# EAGLE board OpenTherm_Board_77X (EAGLE 9.6.2)
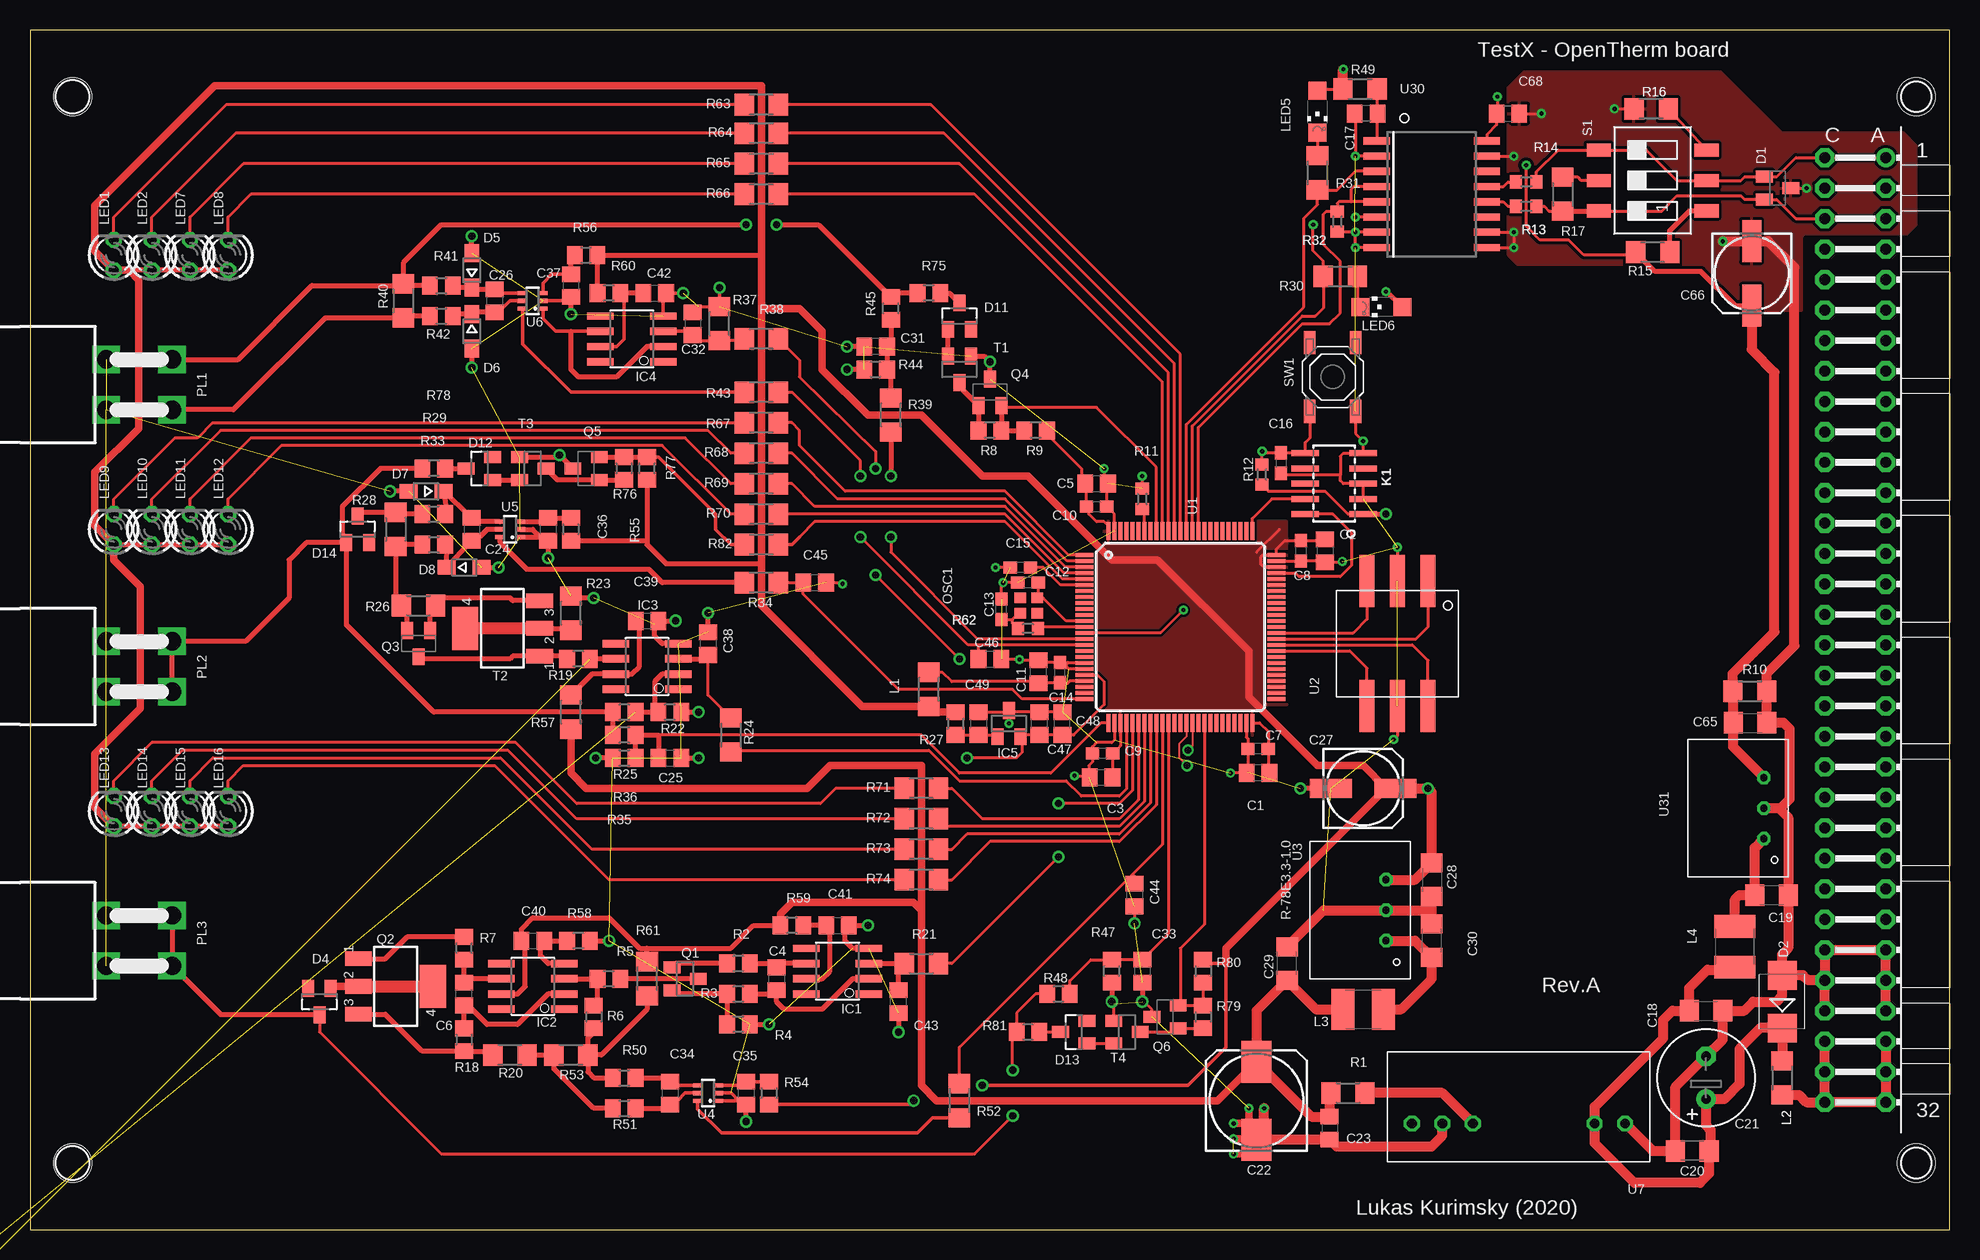
[diagram p0: board, top side]
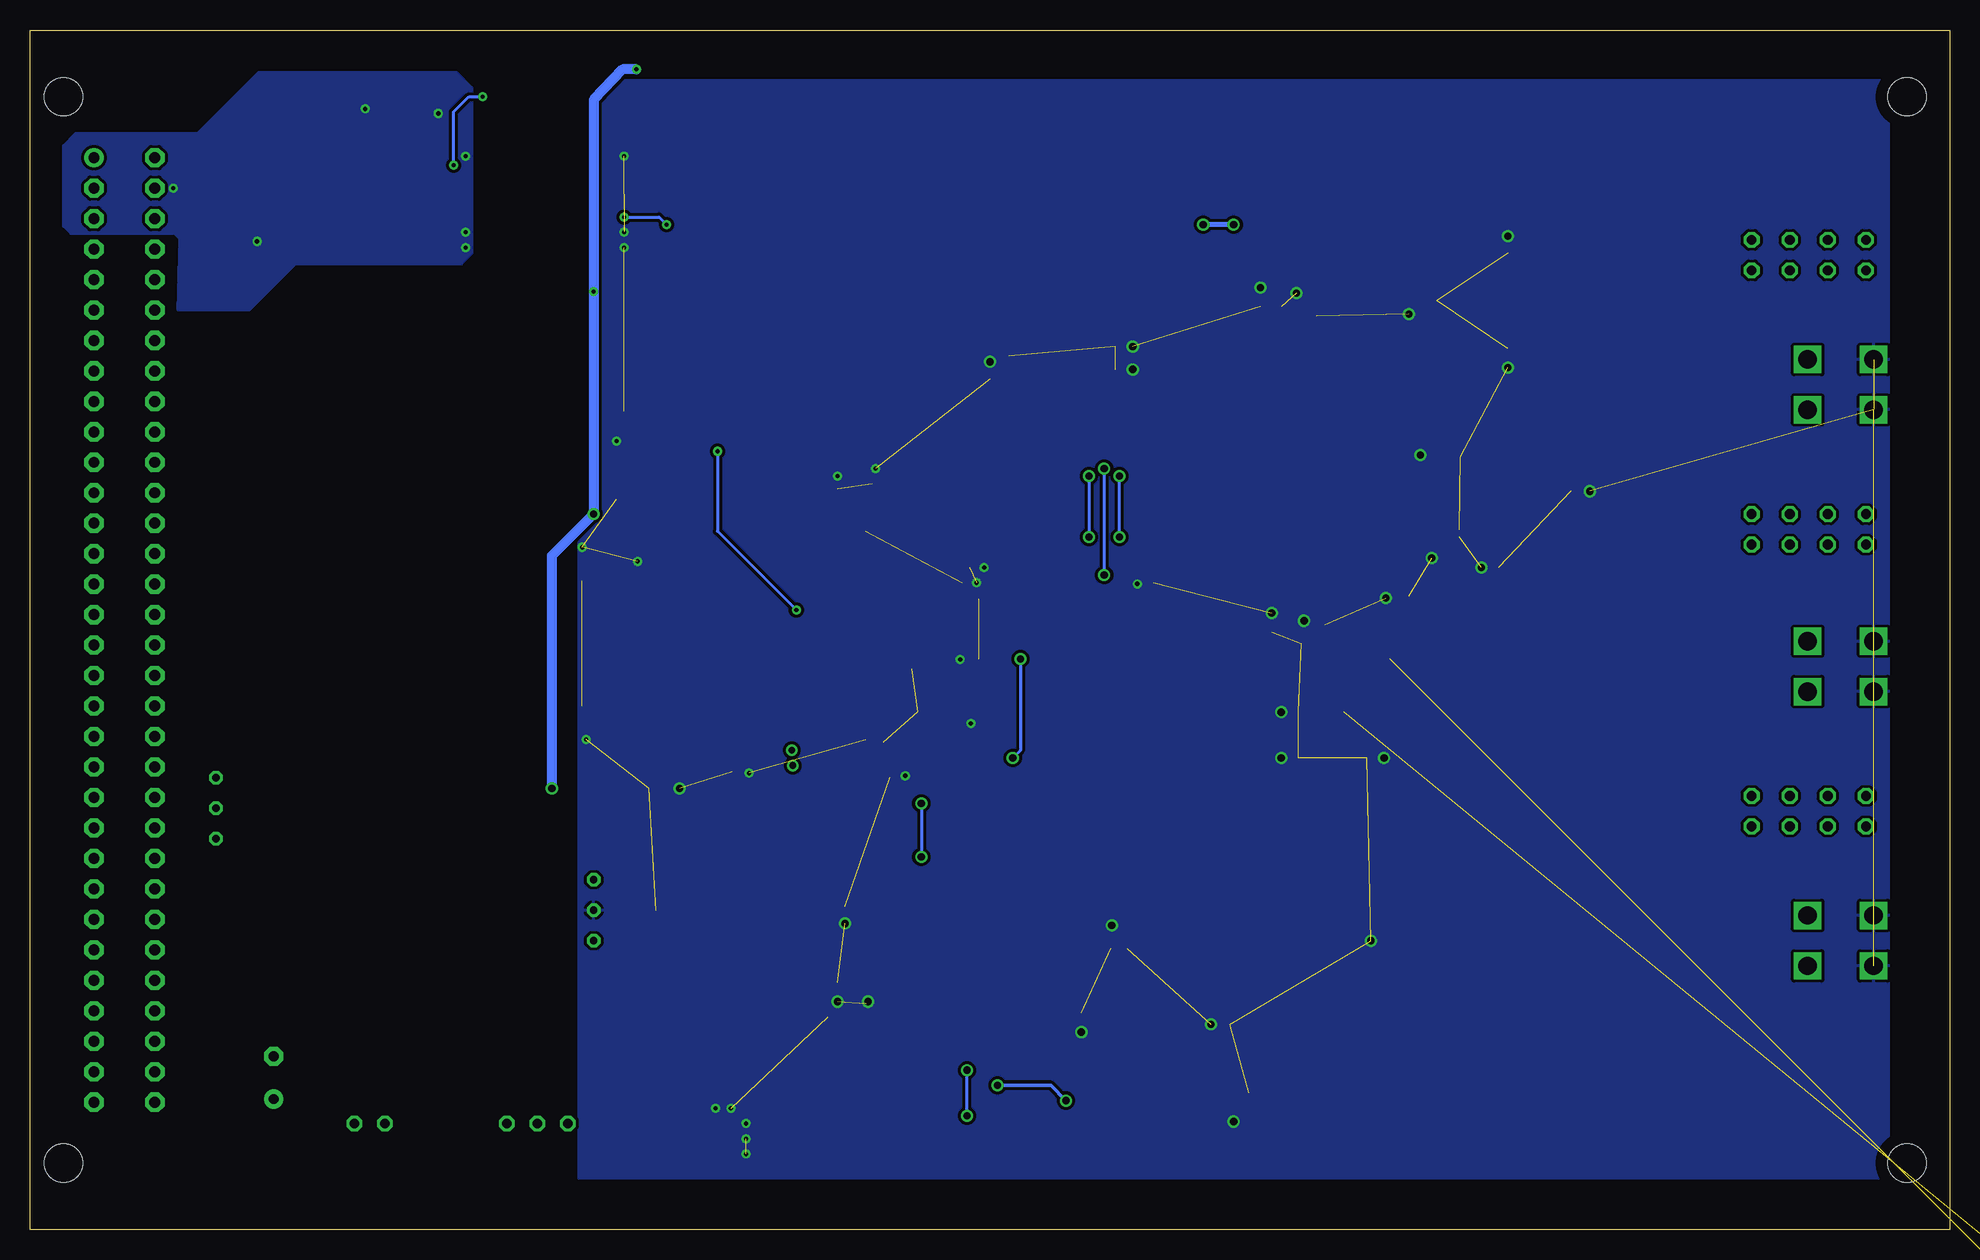
[diagram p1: board, bottom side, seen from below]

Size 160.02 x 100.03 mm. Coordinates in mm from the lower left corner, seen from the top.
Copper layers (1*16): Top 0.035mm / dielectric 1.5mm / Bottom 0.035mm
Design rules "default": minimum track width 6mil, minimum drill 0.35mm, track to track 6mil, track to pad 6mil, pad to pad 6mil, via to via 6mil, smd to smd 6mil, copper to edge 40mil, drill to drill 6mil, minimum pad ring 10mil, minimum via ring 8mil, stop-mask expansion 4mil, vias tented up to drill 0mil, thermal gap 10mil
Holes 3.17 mm at 3.56,5.56 3.56,94.46 157.23,94.46 157.23,5.56

## Footprints (pad centres in the part's own frame; a part is rotated, then mirrored left to right if it is on the bottom)
C0805 = smd 1.3 x 1.5: 1 -0.95,0; 2 0.95,0
C0603 = smd 1.1 x 1: 1 -0.85,0; 2 0.85,0
C0603:1 = smd 1.1 x 1: 1 -0.85,0; 2 0.85,0
C1206 = smd 1.6 x 1.8: 1 -1.4,0; 2 1.4,0
E3,5-8 = drill 0.813 pad 1.6: + -1.778,0 | drill 0.813 pad 1.6 octagon: - 1.778,0
153CLV-0810 = smd 3.5 x 2.5: + 3.25,0; - -3.25,0
153CLV-0605 = smd 3.5 x 1.6: + 2.7,0; - -2.7,0
SOT23-BEC = smd 1 x 1.4: B -0.95,-1.1; C 0,1.1; E 0.95,-1.1
SMB = smd 2.4 x 2.4: A 2.2,0; C -2.2,0
SOT23 = smd 1 x 1.4: 1 -0.95,-1.1; 2 0.95,-1.1; 3 0,1.1
SOD323-W = smd 1.5 x 1.2: A 1.45,0; C -1.45,0
SO08 = smd 0.61 x 2.21: 1 -1.905,-2.616; 2 -0.635,-2.616; 3 0.635,-2.616; 4 1.905,-2.616; 5 1.905,2.616; 6 0.635,2.616; 7 -0.635,2.616; 8 -1.905,2.616
SAMTECH_FTSH-105-01 = smd 0.508 x 2.286: 1 -2.54,-2.413; 2 -2.54,2.413; 3 -1.27,-2.413; 4 -1.27,2.413; 5 0,-2.413; 6 0,2.413; 7 1.27,-2.413; 8 1.27,2.413; 9 2.54,-2.413; 10 2.54,2.413
VG64P = drill 0.914 pad 1.6: A1 154.94,39.37 | drill 0.914 pad 1.6 octagon: A2 154.94,36.83; A3 154.94,34.29; A4 154.94,31.75; A5 154.94,29.21; A6 154.94,26.67; A7 154.94,24.13; A8 154.94,21.59; A9 154.94,19.05; A10 154.94,16.51; A11 154.94,13.97; A12 154.94,11.43; A13 154.94,8.89; A14 154.94,6.35; A15 154.94,3.81; A16 154.94,1.27; A17 154.94,-1.27; A18 154.94,-3.81; A19 154.94,-6.35; A20 154.94,-8.89; A21 154.94,-11.43; A22 154.94,-13.97; A23 154.94,-16.51; A24 154.94,-19.05; A25 154.94,-21.59; A26 154.94,-24.13; A27 154.94,-26.67; A28 154.94,-29.21; A29 154.94,-31.75; A30 154.94,-34.29; A31 154.94,-36.83; A32 154.94,-39.37; C1 149.86,39.37; C2 149.86,36.83; C3 149.86,34.29; C4 149.86,31.75; C5 149.86,29.21; C6 149.86,26.67; C7 149.86,24.13; C8 149.86,21.59; C9 149.86,19.05; C10 149.86,16.51; C11 149.86,13.97; C12 149.86,11.43; C13 149.86,8.89; C14 149.86,6.35; C15 149.86,3.81; C16 149.86,1.27; C17 149.86,-1.27; C18 149.86,-3.81; C19 149.86,-6.35; C20 149.86,-8.89; C21 149.86,-11.43; C22 149.86,-13.97; C23 149.86,-16.51; C24 149.86,-19.05; C25 149.86,-21.59; C26 149.86,-24.13; C27 149.86,-26.67; C28 149.86,-29.21; C29 149.86,-31.75; C30 149.86,-34.29; C31 149.86,-36.83; C32 149.86,-39.37
R1206 = smd 1.6 x 1.803: 1 -1.422,0; 2 1.422,0
L1812 = smd 1.9 x 3.4: 1 -1.696,0; 2 1.696,0
LED3MM = drill 0.813 octagon: A -1.27,0; K 1.27,0
CHIPLED_1206 = smd 1.5 x 1.5: A 0,-1.75; C 0,1.75
OSCILATOR = smd 0.965 x 0.864: 1 -0.762,-0.635; 2 0.635,-0.635; 3 0.635,0.635; 4 -0.762,0.635
5569-4 = drill 1.524 square: 1 2.1,0; 2 -2.1,0; 3 2.1,5.5; 4 -2.1,5.5
SOT223 = smd 1.219 x 2.235: 1 -2.311,-3.099; 2 0,-3.099; 3 2.311,-3.099 | smd 3.6 x 2.2: 4 0,3.099
R0805 = smd 1.3 x 1.5: 1 -0.95,0; 2 0.95,0
R0603 = smd 1 x 1.1: 1 -0.85,0; 2 0.85,0
SMS-003 = smd 1.092 x 2.007: 1 -2.54,-4.496; 2 0,-4.496; 3 2.54,-4.496; 4 2.54,4.496; 5 0,4.496; 6 -2.54,4.496
TACTB-64K-F = smd 1.93 x 0.965: 1 -2.857,1.905; 2 2.857,1.905; 3 -2.857,-1.905; 4 2.857,-1.905
TQFP100 = smd 1.5 x 0.35: 1 -8,6; 2 -8,5.5; 3 -8,5; 4 -8,4.5; 5 -8,4; 6 -8,3.5; 7 -8,3; 8 -8,2.5; 9 -8,2; 10 -8,1.5; 11 -8,1; 12 -8,0.5; 13 -8,0; 14 -8,-0.5; 15 -8,-1; 16 -8,-1.5; 17 -8,-2; 18 -8,-2.5; 19 -8,-3; 20 -8,-3.5; 21 -8,-4; 22 -8,-4.5; 23 -8,-5; 24 -8,-5.5; 25 -8,-6; 51 8,-6; 52 8,-5.5; 53 8,-5; 54 8,-4.5; 55 8,-4; 56 8,-3.5; 57 8,-3; 58 8,-2.5; 59 8,-2; 60 8,-1.5; 61 8,-1; 62 8,-0.5; 63 8,0; 64 8,0.5; 65 8,1; 66 8,1.5; 67 8,2; 68 8,2.5; 69 8,3; 70 8,3.5; 71 8,4; 72 8,4.5; 73 8,5; 74 8,5.5; 75 8,6 | smd 0.35 x 1.5: 26 -6,-8; 27 -5.5,-8; 28 -5,-8; 29 -4.5,-8; 30 -4,-8; 31 -3.5,-8; 32 -3,-8; 33 -2.5,-8; 34 -2,-8; 35 -1.5,-8; 36 -1,-8; 37 -0.5,-8; 38 0,-8; 39 0.5,-8; 40 1,-8; 41 1.5,-8; 42 2,-8; 43 2.5,-8; 44 3,-8; 45 3.5,-8; 46 4,-8; 47 4.5,-8; 48 5,-8; 49 5.5,-8; 50 6,-8; 76 6,8; 77 5.5,8; 78 5,8; 79 4.5,8; 80 4,8; 81 3.5,8; 82 3,8; 83 2.5,8; 84 2,8; 85 1.5,8; 86 1,8; 87 0.5,8; 88 0,8; 89 -0.5,8; 90 -1,8; 91 -1.5,8; 92 -2,8; 93 -2.5,8; 94 -3,8; 95 -3.5,8; 96 -4,8; 97 -4.5,8; 98 -5,8; 99 -5.5,8; 100 -6,8
HEX_DEC = smd 1.219 x 4.318: 1 2.54,5.842; 2 -2.54,-4.572; 4 -2.54,5.842; 8 2.54,-4.572; C1 0,5.842; C2 0,-4.572
R-78E-0.5 = drill 0.6 octagon: 1 -2.54,0; 2 0,0; 3 2.54,0
SC70-6L = smd 0.35 x 0.8: 1 -0.65,-0.85; 2 0,-0.85; 3 0.65,-0.85; 4 0.65,0.85; 5 0,0.85; 6 -0.65,0.85
IU2405SA = drill 0.8 octagon: NC 10.541,0; VIN+ -4.699,0; VIN- -7.239,0; VOUT+ 5.461,0; VOUT- 8.001,0
SO-16DW = smd 0.6 x 2.2: 1 -4.445,-4.6; 2 -3.175,-4.6; 3 -1.905,-4.6; 4 -0.635,-4.6; 5 0.635,-4.6; 6 1.905,-4.6; 7 3.175,-4.6; 8 4.445,-4.6; 9 4.445,4.6; 10 3.175,4.6; 11 1.905,4.6; 12 0.635,4.6; 13 -0.635,4.6; 14 -1.905,4.6; 15 -3.175,4.6; 16 -4.445,4.6

## Placement (x,y rotation side)
C1  1u  [C0805]  102.36,38.07 180 top
C2  1u  [C0805]  107.95,56.62 270 top
C3  1u  [C0805]  89.28,37.69 180 top
C4  100p  [C0805]  62.23,20.93 270 top
C5  1u  [C0805]  88.9,62.2 0 top
C6  100p  [C0805]  36.2,19.66 90 top
C7  100n  [C0603]  102.36,40.11 180 top
C8  100n  [C0603]  105.92,56.62 270 top
C9  100n  [C0603]  89.41,39.73 180 top
C10  100n  [C0603]  88.9,60.3 0 top
C11  1u  [C0805]  84.07,46.52 90 top
C12  10p  [C0603]  83.19,53.95 180 top
C13  10p  [C0603]  80.96,51.73 90 top
C14  220p  [C0603]  85.85,46.46 90 top
C15  680n  [C0603:1]  82.55,55.22 180 top
C16  100n  [C0603]  104.27,63.92 270 top
C17  100n  [C0805]  111.38,93.07 180 top
C18  10u  [C1206]  139.7,18.26 0 top
C19  4.7u  [C1206]  145.16,27.91 0 top
C20  100n  [C1206]  138.56,6.58 180 top
C21  47u  [E3,5-8]  139.7,12.67 90 top
C22  47u  [153CLV-0810]  102.23,10.77 90 top
C23  100n  [C0805]  108.33,8.48 270 top
C24  1n  [C0805]  36.83,58.39 270 top
C25  1n  [C0805]  53.34,39.34 0 top
C26  1n  [C0805]  38.73,77.44 270 top
C27  100u  [153CLV-0605]  111.12,36.8 0 top
C28  10u  [C1206]  116.84,29.18 270 top
C29  10u  [C1206]  104.78,22.2 90 top
C30  4.7u  [C1206]  116.84,24.1 90 top
C31  1n  [C0805]  70.48,73.63 180 top
C32  100n  [C0805]  55.24,75.54 270 top
C33  1n  [C0805]  92.71,21.56 270 top
C34  10n  [C0805]  53.34,11.4 270 top
C35  100n  [C0805]  59.69,11.4 270 top
C36  100n  [C0805]  43.18,58.39 270 top
C37  100n  [C0805]  45.09,78.71 270 top
C38  NC  [C0805]  56.52,48.87 270 top
C39  100n  [C0805]  51.44,50.77 0 top
C40  100n  [C0805]  41.91,24.1 0 top
C41  100n  [C0805]  67.31,25.37 0 top
C42  100n  [C0805]  52.07,78.08 0 top
C43  ?  [C0805]  72.39,19.02 90 top
C44  ?  [C0805]  92.08,27.91 270 top
C45  NC  [C0805]  65.41,53.95 0 top
C46  NC  [C0805]  80.01,47.6 0 top
C47  100n  [C0805]  84.14,42.2 90 top
C48  1u  [C0805]  86.04,42.2 90 top
C49  470n  [C0805]  79.06,42.2 270 top
C50  100p  [C0805]  -5.08,-3.2 0 top  (outside the outline)
C65  10u  [C1206]  143.38,42.27 0 top
C66  100u  [153CLV-0605]  143.51,79.73 270 top
C68  100n  [C0805]  123.19,93.07 0 top
D1  SM712-02HTG  [SOT23-BEC]  145.67,86.84 270 top
D2  SMBJ26A  [SMB]  146.05,19.02 90 top
D4  BAV99  [SOT23]  24.13,19.02 180 top
D5  CDSOD323-T36S  [SOD323-W]  36.83,79.98 90 top
D6  CDSOD323-T36S  [SOD323-W]  36.83,74.9 270 top
D7  CDSOD323-T36S  [SOD323-W]  33.02,61.57 180 top
D8  CDSOD323-T36S  [SOD323-W]  36.2,55.22 0 top
D11  BAV99  [SOT23]  77.47,76.17 0 top
D12  BAV99  [SOT23]  37.47,63.47 90 top
D13  BAV99  [SOT23]  87,16.48 90 top
D14  BAV99  [SOT23]  27.3,58.39 0 top
IC1  OPA196  [SO08]  67.31,21.56 90 top
IC2  OPA196  [SO08]  41.91,20.29 90 top
IC3  OPA196  [SO08]  51.44,46.96 90 top
IC4  TLV333  [SO08]  50.16,74.27 90 top
IC5  REF3025  [SOT23]  81.6,42.2 0 top
K1  FTS-105-01-L-DV  [SAMTECH_FTSH-105-01]  108.71,62.2 90 top
K2  09 03 364 6921  [VG64P]  -0.25,50.01 0 top
L1  LQM31PN1R0M00L  [R1206]  74.93,45.06 270 top
L2  LQM31PN1R0M00L  [R1206]  146.05,12.67 90 top
L3  1008PS-103KLC  [L1812]  111.12,18.39 0 top
L4  1008PS-103KLC  [L1812]  142.11,23.6 90 top
LED1  GREEN  [LED3MM]  6.99,81.25 90 top
LED2  RED  [LED3MM]  10.16,81.25 90 top
LED5  GREEN  [CHIPLED_1206]  107.31,93.19 180 top
LED6  RED  [CHIPLED_1206]  112.65,76.94 90 top
LED7  BLUE  [LED3MM]  13.34,81.25 90 top
LED8  YELLOW  [LED3MM]  16.51,81.25 90 top
LED9  GREEN  [LED3MM]  6.99,58.39 90 top
LED10  RED  [LED3MM]  10.16,58.39 90 top
LED11  BLUE  [LED3MM]  13.34,58.39 90 top
LED12  YELLOW  [LED3MM]  16.51,58.39 90 top
LED13  GREEN  [LED3MM]  6.99,34.9 90 top
LED14  RED  [LED3MM]  10.16,34.9 90 top
LED15  BLUE  [LED3MM]  13.34,34.9 90 top
LED16  YELLOW  [LED3MM]  16.51,34.9 90 top
OSC1  Q22FA12800249  [OSCILATOR]  83.19,52.04 180 top
PL1  39-30-0040  [5569-4]  6.35,70.46 270 top
PL2  39-30-0040  [5569-4]  6.35,46.96 270 top
PL3  39-30-0040  [5569-4]  6.35,24.1 270 top
Q1  BSS123  [SOT23]  54.61,20.93 270 top
Q2  BSP170P  [SOT223]  30.48,20.29 270 top
Q3  BC856BSMD  [SOT23-BEC]  32.38,48.87 180 top
Q4  BC857CSMD  [SOT23-BEC]  80.01,69.82 0 top
Q5  BC857CSMD  [SOT23-BEC]  46.35,63.47 90 top
Q6  BC857CSMD  [SOT23-BEC]  94.61,17.75 90 top
R1  0R1  [R1206]  109.86,11.4 180 top
R2  1k  [R0805]  59.05,22.2 180 top
R3  1k  [R0805]  59.05,19.66 180 top
R4  1k 1%  [R0805]  59.05,17.12 180 top
R5  5k6  [R0805]  48.26,20.93 180 top
R6  200R 1%  [R0805]  46.99,17.75 270 top
R7  1k  [R0805]  36.2,23.47 90 top
R8  680k  [R0805]  80.01,66.65 180 top
R9  20k  [R0805]  83.82,66.65 180 top
R10  470R  [R1206]  143.35,44.9 180 top
R11  0R  [R0603]  92.71,60.93 270 top
R12  10k  [R0603]  102.68,62.97 270 top
R13  10R  [R0603]  124.71,85.32 180 top
R14  10R  [R0603]  124.71,87.35 180 top
R15  1k  [R1206]  135.25,81.51 180 top
R16  1k  [R1206]  135.13,93.45 0 top
R17  130R  [R1206]  127.76,86.33 90 top
R18  1k  [R0805]  36.2,15.85 270 top
R19  10k  [R0805]  45.72,47.6 180 top
R20  18R 1%  [R1206]  40.01,14.58 0 top
R21  0R  [R1206]  74.3,22.2 180 top
R22  20k 1%  [R0805]  53.34,43.15 180 top
R23  220R 250mW  [R1206]  45.09,51.41 270 top
R24  0R  [R1206]  58.42,41.25 90 top
R25  180k 1%  [R0805]  49.53,43.15 180 top
R26  20R  [R1206]  32.38,52.04 180 top
R27  1R  [R0805]  77.15,42.2 270 top
R28  2R 1%  [R1206]  30.48,58.39 90 top
R29  1k  [R0805]  33.66,59.66 0 top
R30  1k5  [R1206]  109.22,79.48 180 top
R31  1k5  [R1206]  107.31,88.11 270 top
R32  10k  [R0603]  108.97,84.05 90 top
R33  1k  [R0805]  33.66,57.12 0 top
R34  0R  [R1206]  60.96,53.95 0 top
R35  20k 1%  [R0805]  49.53,39.34 0 top
R36  180k 1%  [R0805]  49.53,41.25 180 top
R37  1k  [R1206]  57.47,75.54 270 top
R38  1k  [R1206]  60.96,74.27 0 top
R39  0R  [R1206]  71.75,67.92 270 top
R40  2R 1%  [R1206]  31.11,77.44 90 top
R41  1k  [R0805]  34.29,78.71 0 top
R42  1k  [R0805]  34.29,76.17 0 top
R43  0R  [R1206]  60.96,69.82 0 top
R44  20k 1%  [R0805]  70.48,71.73 0 top
R45  180k 1%  [R0805]  71.75,76.81 90 top
R47  20k 1%  [R0805]  90.17,21.56 90 top
R48  180k 1%  [R0805]  85.72,19.66 180 top
R49  0R1  [R1206]  110.87,95.1 180 top
R50  100R  [R0805]  49.53,12.67 0 top
R51  100R  [R0805]  49.53,10.13 0 top
R52  0R  [R1206]  77.47,10.77 90 top
R53  2R 1%  [R1206]  45.09,14.58 0 top
R54  1R  [R0805]  61.59,11.4 270 top
R55  1R  [R0805]  45.09,58.39 270 top
R56  1R  [R0805]  46.35,81.25 0 top
R57  1R  [R1206]  45.09,43.15 270 top
R58  1R  [R0805]  45.72,24.1 180 top
R59  1R  [R0805]  63.5,25.37 180 top
R60  1R  [R0805]  48.26,78.08 180 top
R61  0R  [R1206]  51.44,20.93 90 top
R62  390R  [R0603]  83.19,50.14 0 top
R63  470R  [R1206]  60.96,93.8 0 top
R64  470R  [R1206]  60.96,91.41 0 top
R65  470R  [R1206]  60.96,88.87 0 top
R66  470R  [R1206]  60.96,86.33 0 top
R67  470R  [R1206]  60.96,67.28 0 top
R68  470R  [R1206]  60.96,64.74 0 top
R69  470R  [R1206]  60.96,62.2 0 top
R70  470R  [R1206]  60.96,59.66 0 top
R71  470R  [R1206]  74.3,36.8 0 top
R72  470R  [R1206]  74.3,34.26 0 top
R73  470R  [R1206]  74.3,31.72 0 top
R74  470R  [R1206]  74.3,29.18 0 top
R75  20k  [R0805]  74.93,78.08 180 top
R76  680k  [R0805]  49.53,63.47 270 top
R77  20k  [R0805]  51.44,63.47 90 top
R78  20k  [R0805]  33.66,63.47 180 top
R79  680k  [R0805]  97.79,17.75 270 top
R80  20k  [R0805]  97.79,21.56 270 top
R81  20k  [R0805]  83.19,16.48 180 top
R82  0R  [R1206]  60.96,57.12 0 top
S1  SWS003  [SMS-003]  135.25,87.48 90 top
SW1  TACTB-64K-F  [TACTB-64K-F]  108.58,71.09 90 top
T1  BC847C  [SOT23]  77.47,71.73 180 top
T2  BCP53  [SOT223]  39.37,50.14 90 top
T3  BC847C  [SOT23]  41.91,63.47 270 top
T4  BC847C  [SOT23]  91.44,16.48 270 top
U1  STM32L073VBT6  [TQFP100]  95.89,50.27 0 top
U2  SH-7050TB  [HEX_DEC]  113.98,48.23 0 top
U3  R-78E3.3-1.0  [R-78E-0.5]  113.03,26.64 90 top
U4  INA186A2  [SC70-6L]  56.52,11.4 90 top
U5  INA186A2  [SC70-6L]  40.01,58.39 90 top
U6  INA186A2  [SC70-6L]  41.91,77.44 90 top
U7  IU2424SA  [IU2405SA]  125.73,8.86 180 top
U30  ISO3082  [SO-16DW]  116.84,86.33 270 top
U31  R-78E5.0-0 5  [R-78E-0.5]  144.53,35.15 90 top

## Library data of the parts
C1-C11 C13 C14 C16-C20 C23-C26 C28-C50 C65 C68 R1-R12 R15-R45 R47-R82 = rcl
C12 C15 = NTC_Board; SPICEPREFIX: C
C21 C27 C66 = rcl; SPICEPREFIX: C
C22 = rcl@1; SPICEPREFIX: C
D1 = NTC_Board_REVB; OC_FARNELL: 2749175
D2 = NTC_Board_REVB; OC_FARNELL: 1827615
D4-D8 D11-D14 = diode
IC1-IC4 = burr-brown; MPN: OPA340UA; OC_FARNELL: 1106196; OC_NEWARK: 24M5449
IC5 = microchip; OC_FARNELL: unknown; OC_NEWARK: unknown
K1 = NTC_Board; OC_FARNELL: 1667729
K2 = NTC_Board_REVB; OC_FARNELL: 1096949
L1 L2 = NTC_Board; OC_FARNELL: 2470292; SPICEPREFIX: L
L3 L4 = Input_board; OC_FARNELL: 2286876; SPICEPREFIX: L
LED1 LED2 LED7-LED16 = led
LED5 LED6 = NTC_Board
OSC1 = NTC_Board; OC_FARNELL: 2723223
PL1-PL3 = con-molex-2; OC_FARNELL: 1697133
Q1 = transistor-small-signal
Q2 = transistor-fet
Q3-Q6 = transistor-pnp
R13 R14 = rcl; OC_FARNELL: 2887146
S1 = NTC_Board_REVB; OC_FARNELL: 1524006
SW1 = NTC_Board_REVB
T1 T3 T4 = transistor-neu-to92
T2 = zetex; MPN: DJT4030P-13; OC_FARNELL: 1710675; OC_NEWARK: 25R4489
U1 = NTC_Board_REVB; OC_FARNELL: 3132645
U2 = NTC_Board_REVB; OC_FARNELL: 2854802
U3 U31 = Relay_Board_REVB; OC_FARNELL: 2078564
U4-U6 = maxim
U7 = NTC_Board_REVB; OC_FARNELL: 1435422
U30 = texas; OC_FARNELL: 1755040

## Nets
+3V3: C1.1 C2.1 C3.1 C5.1 C7.1 C8.1 C9.1 C10.1 C27.+ C28.1 K1.1 L1.2 LED1.A LED2.A LED5.A LED6.A LED7.A LED8.A LED9.A LED10.A LED11.A LED12.A LED13.A LED14.A LED15.A LED16.A R9.1 R12.2 R27.1 R49.2 R54.2 R55.2 R56.2 R60.2 R77.1 R80.1 U1.28 U1.50 U1.73 U1.75 U1.100 U3.3
+24V: C22.+ C23.1 C29.1 C40.1 IC2.7 L3.1 R1.2 R57.2 R59.2 R61.2
+24V_IN: K2.A30 K2.A31 K2.A32 K2.C30 K2.C31 K2.C32 L2.1
ADC_CURRENT: C45.1 R34.2 U1.25
ADC_CURRENT_MONITOR: C46.1 R43.2 U1.16
ADC_CURRENT_THERMOSTAT: C44.1 R52.2 U1.35
ADC_VOLTAGE: C25.1 R35.2 R36.1 U1.26
ADC_VOLTAGE_MONITOR: R39.2 U1.15
ADC_VOLTAGE_THERMOSTAT: C33.1 R47.2 R48.1 U1.36
ADDR1_HEX: U1.61 U2.1
ADDR2_HEX: U1.59 U2.2
ADDR4_HEX: U1.62 U2.4
ADDR8_HEX: U1.60 U2.8
AUX_1: K2.A2
AUX_2: K2.C2
AUX_3: K2.A4
AUX_4: K2.C4
AUX_5: K2.A5
AUX_6: K2.C5
AUX_7: K2.A6
AUX_8: K2.C6
AUX_9: K2.A7
AUX_10: K2.C7
AUX_11: K2.A8
AUX_12: K2.C8
AUX_13: K2.A9
AUX_14: K2.C9
AUX_15: K2.A10
AUX_16: K2.C10
AUX_17: K2.A11
AUX_18: K2.C11
AUX_19: K2.A12
AUX_20: K2.C12
AUX_21: K2.A13
AUX_22: K2.C13
AUX_23: K2.A14
AUX_24: K2.C14
AUX_25: K2.A15
AUX_26: K2.C15
AUX_27: K2.A16
AUX_28: K2.C16
AUX_29: K2.A17
AUX_30: K2.C17
AUX_31: K2.A18
AUX_32: K2.C18
AUX_33: K2.A19
AUX_34: K2.C19
AUX_35: K2.A20
AUX_36: K2.C20
AUX_37: K2.A21
AUX_38: K2.C21
AUX_39: K2.A22
AUX_40: K2.C22
AUX_41: K2.A23
AUX_42: K2.C23
AUX_43: K2.A24
AUX_44: K2.C24
AUX_45: K2.A25
AUX_46: K2.C25
AUX_47: K2.A26
AUX_48: K2.C26
AUX_MCU4: U1.39
AUX_MCU5: U1.40
BOOT: R11.2 U1.94
DAC_CURRENT_THERMOSTAT: R21.1 U1.30
DAC_VOLTAGE: R24.1 U1.29
GND: C1.2 C2.2 C3.2 C5.2 C7.2 C8.2 C9.2 C10.2 C11.2 C12.2 C13.2 C14.2 C15.2 C16.2 C17.2 C22.- C23.2 C25.2 C27.- C28.2 C29.2 C30.2 C31.2 C32.1 C33.2 C35.2 C36.2 C37.2 C38.1 C39.2 C41.2 C42.2 C43.1 C44.2 C45.2 C46.2 C47.2 C48.2 C49.1 D5.A D6.A D7.A D8.A IC1.4 IC3.4 IC4.4 IC5.3 K1.3 K1.5 K1.9 PL1.1 PL1.2 PL2.1 PL2.2 PL3.1 PL3.2 Q4.C Q5.C Q6.C R4.1 R11.1 R22.1 R23.1 R32.1 R35.1 R37.1 R44.1 R47.1 R58.1 SW1.3 T1.1 T3.1 T4.1 U1.19 U1.20 U1.27 U1.49 U1.74 U1.99 U2.C1 U2.C2 U3.2 U4.1 U4.2 U5.1 U5.2 U6.2 U7.VOUT- U30.2 U30.7 U30.8
GND1: C18.2 C19.2 C20.2 C21.- C65.2 C66.- C68.2 D1.C D2.A K2.A27 K2.A28 K2.A29 K2.C27 K2.C28 K2.C29 R10.1 R16.1 U7.VIN- U30.9 U30.10 U30.15 U31.2
LED1: R63.2 U1.88
LED2: R64.2 U1.89
LED3: R65.2 U1.90
LED4: R66.2 U1.91
LED5: R67.2 U1.1
LED6: R68.2 U1.2
LED7: R69.2 U1.3
LED8: R70.2 U1.4
LED9: R71.2 U1.31
LED10: R72.2 U1.32
LED11: R73.2 U1.33
LED12: R74.2 U1.34
MODBUS_A: D1.E K2.A3 K2.C3 R13.1 R17.1 S1.6
MODBUS_B: D1.B K2.A1 K2.C1 R14.1 S1.2 S1.4
N$1: IC2.3 R5.2 R6.1
N$2: C15.1 U1.6
N$3: Q1.3 R5.1
N$4: D4.1 Q2.2 Q2.4
N$5: Q1.2 R3.2 R4.2
N$6: Q1.1 R2.2
N$7: R14.2 U30.13
N$8: C4.1 IC1.6 R2.1
N$9: C4.2 IC1.2 R3.1
N$10: C6.2 IC2.6 R7.1
N$11: C6.1 IC2.2 R18.1
N$12: Q2.3 R18.2 R20.1
N$13: Q2.1 R7.2
N$14: C18.1 C20.1 C21.+ D2.C L2.2 L4.1 U7.VIN+
N$15: C43.2 IC1.3 R21.2
N$16: C30.1 L3.2 U3.1
N$17: C49.2 IC5.1 R27.2
N$18: R23.2 T2.2 T2.4
N$19: R1.1 U7.VOUT+
N$20: LED5.C R31.1
N$21: C50.2 IC3.6 R19.1
N$22: C50.1 IC3.2 R22.2 R25.1
N$23: R13.2 U30.12
N$24: C38.2 IC3.3 R24.2
N$25: Q3.C R19.2 T2.1
N$26: Q3.B R26.1 T2.3
N$27: Q3.E R26.2 R28.1 R33.1
N$28: D14.3 R28.2 R29.1
N$29: C24.1 D7.C R29.2 U5.4
N$30: C24.2 D8.C R33.2 U5.5
N$32: R6.2 R50.1 R53.2 R61.1
N$33: C34.1 R50.2 U4.4
N$34: R15.1 S1.1
N$35: R16.2 S1.3
N$36: R17.2 S1.5
N$37: LED6.C R30.1
N$38: C32.2 IC4.3 R37.2 R38.1
N$39: C26.1 D5.C R41.2 U6.4
N$40: C26.2 D6.C R42.2 U6.5
N$41: Q5.B R76.2 T3.3
N$42: C34.2 R51.2 U4.5
N$43: R20.2 R51.1 R53.1
N$44: R52.1 U4.6
N$45: C35.1 R54.1 U4.3
N$46: R34.1 U5.6
N$47: C36.1 R55.1 U5.3
N$48: R43.1 U6.6
N$49: C37.1 R56.1 U6.3
N$50: C39.1 IC3.7 R57.1
N$51: C40.2 IC2.4 R58.2
N$52: C41.1 IC1.7 R59.1
N$53: C42.1 IC4.7 R60.1
N$54: Q4.B R8.2 T1.3
N$55: LED1.K R63.1
N$56: LED2.K R64.1
N$57: LED7.K R65.1
N$58: LED8.K R66.1
N$59: LED9.K R67.1
N$60: LED10.K R68.1
N$61: D11.1 T1.2
N$62: D11.3 R75.1
N$63: C19.1 L4.2 U31.1
N$64: LED11.K R69.1
N$65: LED12.K R70.1
N$66: LED13.K R71.1
N$67: C17.1 R49.1 U30.1
N$68: LED14.K R72.1
N$69: LED15.K R73.1
N$70: LED16.K R74.1
N$71: C31.1 R39.1 R44.2 R45.1
N$72: D12.1 T3.2
N$73: D12.3 R78.1
N$74: Q6.B R79.2 T4.3
N$75: D13.1 T4.2
N$76: D13.3 R81.1
N$77: Q5.E R76.1 R77.2 R82.1
NRST: C16.1 K1.10 R12.1 SW1.1 U1.14
OSC: C13.1 OSC1.3 R62.1
OSC+: C12.1 OSC1.1 U1.12
OSC-: R62.2 U1.13
OT_CONTROLLER: D14.1 PL2.3 PL2.4 R25.2 R36.2 R78.2
OT_MONITOR_L: PL1.3 R40.1 R42.1
OT_MONITOR_R: PL1.4 R40.2 R41.1 R45.2 R75.2
OT_THERMOSTAT: D4.3 PL3.3 PL3.4 R48.2 R81.2
POLARITY_CONTROLLER: R82.2 U1.5
POLARITY_MONITOR: Q4.E R8.1 R9.2 U1.92
POLARITY_THERMOSTAT: Q6.E R79.1 R80.2 U1.42
SPI1_CS: U1.43
SPI1_MISO: U1.45
SPI1_MOSI: U1.46
SPI1_SCLK: U1.44
SWCLK: K1.4 U1.76
SWDIO: K1.2 U1.72
USART2_DE: R32.2 U1.85 U30.4 U30.5
USART2_RXD: R31.2 U1.87 U30.3
USART2_TXD: R30.2 U1.86 U30.6
VCC: C65.1 C66.+ C68.1 R10.2 R15.2 U30.16 U31.3
VDDA: C11.1 C14.1 L1.1 U1.22
VREF: C47.1 C48.1 IC5.2 R38.2 U1.21
VREF/2: IC4.2 IC4.6 U6.1

## Tracks (layer width: path | path; a pad name or v marks a point on that pad's centre or on a via)
+3V3  (via drill 0.35, 0.6)
  Top 0.254: U1.50 102.49,42.27 103.21,41.54 C7.1 103.21,38.17 C1.1 | C2.1 107.85,57.47 C8.1 104.61,57.47 103.89,56.74 U1.75 102.77,56.27 102.62,56.11 102.62,55.47 102.82,55.27 U1.73 | C3.1 90.23,39.7 C9.1 90.89,40.35 U1.28 | LED5.A 107.47,95.1 R49.2 | R12.2 103.23,61.57 107.95,61.57 109.86,59.66 K1.1 | 104.14,58.39 102.23,56.49 | U1.100 89.89,58.68 89.53,59.03 88.9,59.03 88.27,59.66 88.27,60.3 C10.1 88.05,62.2 C5.1 87.63,62.52 87.63,63.47 84.77,66.33 R9.1
  Top 0.305: R54.2 73.34,10.45 v73.66,10.77 | v79.38,12.04 96.52,12.04 99.69,15.21 99.69,22.2 98.11,22.2 R80.1
  Top 0.406: 109.45,96.72 v109.47,96.75 | R60.2 R56.2 60.96,81.25 | R55.2 51.44,57.44 | 51.44,57.44 51.44,57.12 53.02,55.54 60.96,55.54 | LED6.A 114.4,76.96 v113.03,78.21 | K1.1 v113.03,59.66 | R77.1 51.44,57.44 | LED8.A LED7.A LED2.A LED1.A | LED16.A LED15.A LED14.A LED13.A | LED9.A LED10.A LED11.A LED12.A
  Top 0.61: 60.96,76.81 60.96,81.25 60.96,95.38 15.4,95.38 5.4,85.38 5.4,81.57 LED1.A 8.26,79.98 9.05,79.19 9.05,66.81 5.4,63.16 5.4,58.71 LED9.A 6.99,55.85 9.21,53.63 9.21,43.47 5.4,39.66 5.4,35.22 LED13.A | 60.96,76.81 60.96,55.54 60.96,52.04 69.37,43.64 L1.2 75.42,43.15 R27.1 | 113.03,36.8 111.12,38.71 107.31,38.71 101.6,44.42 101.6,48.23 93.98,55.85 90.17,55.85 83.19,62.84 79.38,62.84 74.3,67.92 69.85,67.92 66.04,71.73 66.04,74.9 64.14,76.81 60.96,76.81 | 113.03,36.8 C27.+ | 99.69,22.2 99.69,23.47 113.03,36.8
  Top 0.813: R49.2 109.45,96.72 | C27.+ v116.52,36.8 116.84,36.49 C28.1 115.44,29.18 U3.3
  Bottom 0.305: v73.66,10.77 74.93,12.04 v79.38,12.04
  Bottom 0.813: v109.47,96.75 110.62,96.75 113.03,94.21 v113.03,78.21 v113.03,59.66 116.52,56.17 v116.52,36.8
  pour Top (isolate 0.178): 87,56.49 87,43.79 89.53,41.25 102.23,41.25 102.23,43.79 104.78,43.79 104.78,59.03 89.53,59.03 89.53,56.49
+24V
  Top 0.406: IC2.7 40.64,19.66 41.27,20.29 41.27,23.79 C40.1 40.96,25.06 41.91,26.01 48.26,26.01 50.8,23.47 51.44,23.47 | 51.44,23.47 58.42,23.47 60.33,25.37 R59.2 | R61.2 51.44,23.47
  Top 0.61: R59.2 62.55,26.33 63.5,27.28 73.66,27.28 74.3,26.64 | 74.3,26.64 74.3,12.04 75.56,10.77 98.98,10.77 C22.+ | R57.2 45.09,38.07 46.35,36.8 64.77,36.8 66.67,38.71 74.3,38.71 74.3,26.64
  Top 0.813: L3.1 107.19,18.39 C29.1 102.23,18.26 C22.+ 106.82,9.43 C23.1 108.33,11.3 R1.2
+24V_IN
  Top 0.813: L2.1 147.47,11.25 148.08,10.64 K2.C32 | K2.C32 K2.C31 K2.C30 | K2.A30 K2.A31 K2.A32 K2.C32
ADC_CURRENT
  Top 0.254: U1.25 82.71,44.27 81.92,45.06 72.39,45.06 64.45,52.99 C45.1 R34.2
ADC_CURRENT_MONITOR  (via drill 0.6)
  Top 0.254: U1.16 79.06,48.77 | 79.06,48.77 78.21,48.77 v69.22,57.76 | R43.2 63.5,69.82 69.22,64.11 v69.22,62.84 | C46.1 79.06,48.77
  Bottom 0.254: v69.22,57.76 v69.22,62.84
ADC_CURRENT_THERMOSTAT
  Top 0.254: U1.35 94.39,32.13 91.76,29.5 | 91.76,29.5 77.47,15.21 R52.2 | C44.1 92.08,29.5 91.76,29.5
ADC_VOLTAGE
  Top 0.254: U1.26 89.28,42.27 85.09,38.07 77.47,38.07 74.3,41.25 R36.1
  Top 0.406: R35.2 R36.1 52.39,41.25 C25.1
ADC_VOLTAGE_MONITOR  (via drill 0.6)
  Top 0.254: U1.15 78.98,49.27 71.75,56.49 v71.75,57.76
  Top 0.406: R39.2 v71.75,62.84
  Bottom 0.254: v71.75,62.84 v71.75,57.76
ADC_VOLTAGE_THERMOSTAT
  Top 0.254: U1.36 94.89,24.69 C33.1 R47.2 88.42,22.51 86.67,20.77 R48.1
ADDR1_HEX
  Top 0.254: U2.1 116.52,50.27 115.52,49.27 U1.61
ADDR2_HEX
  Top 0.254: U1.59 110.01,48.27 111.44,46.84 U2.2
ADDR4_HEX
  Top 0.254: U2.4 111.44,50.9 110.31,49.77 U1.62
ADDR8_HEX
  Top 0.254: U2.8 116.52,47.47 115.23,48.77 U1.60
AUX_MCU4  (via drill 0.55)
  Top 0.152: v96.44,38.71 95.8,39.35 95.8,40.53 96.39,41.12 U1.39
AUX_MCU5  (via drill 0.55)
  Top 0.152: U1.40 96.89,40.34 v96.52,39.98
BOOT
  Top 0.254: U1.94 92.89,60.08 R11.2
DAC_CURRENT_THERMOSTAT  (via drill 0.6)
  Top 0.254: v85.72,35.53 90.81,35.53 91.89,36.61 U1.30 | v85.72,31.09 76.83,22.2 R21.1
  Bottom 0.254: v85.72,35.53 v85.72,31.09
DAC_VOLTAGE
  Top 0.254: U1.29 91.39,36.75 90.81,36.17 87.63,36.17 86.36,37.44 77.47,37.44 74.93,39.98 58.42,39.98 R24.1
GND  (via drill 0.35, 0.6)  (50 unrouted)
  Top 0.254: U30.2 v110.49,89.51 110.49,93 C17.2 | U30.8 v110.49,81.89 v110.49,83.16 | U30.7 v110.49,83.16 | R32.1 110.45,83.2 v110.49,83.16 | K1.3 K1.5 109.47,62.2 109.22,62.46 109.22,62.91 | U1.19 86.53,47.27 | 86.53,47.27 86.3,47.03 86.56,46.77 U1.20 | U1.49 101.39,41.08 101.51,40.96 C7.2 101.51,38.17 C1.2 v100.08,38.07 | v109.38,55.73 109.38,55.67 C2.2 107.85,55.77 C8.2 U1.74 | SW1.3 110.49,66.4 v111.12,65.76 K1.9 109.47,64.74 109.22,64.49 109.22,62.91 | 88.49,37.85 C3.2 88.17,37.85 v87.06,37.85 | 88.49,37.85 88.56,37.92 | U2.C2 113.98,41.19 v113.67,40.87 | v113.98,56.9 U2.C1 | 86.53,47.27 86.5,47.31 C14.2 84.24,47.31 C11.2 82.55,47.47 v82.49,47.54 82.42,47.6 C46.2 | C16.2 104.43,62.91 109.22,62.91 | U1.27 90.39,40.83 90.17,40.61 88.9,40.61 88.56,40.27 C9.2 88.56,39 88.27,38.71 88.27,38.07 88.49,37.85 | C12.2 v81.12,53.95 81.12,53.79 80.96,53.63 C13.2 | C15.2 v80.49,55.22 | T4.1 90.34,18.85 v90.17,19.02 | Q6.C 93.52,18.38 92.87,19.02 v92.71,19.02 | U1.99 90.39,59.66 C10.2 89.75,62.2 C5.2 89.53,62.2 v89.53,63.47 | R11.1 v92.71,62.84 | C45.2 67.72,53.95 v67.72,53.85 | C44.2 v92.08,25.53 | C48.2 C47.2 81.75,43.15 | 81.75,43.15 IC5.3 81.45,43.15 C49.1 | 81.75,43.15 81.6,43.15 v81.6,42.2 | C32.1 55.72,76.96 R37.1
  Top 0.305: U4.2 58.42,11.4 59.05,10.77 59.38,10.77 C35.2 59.39,10.75 U4.1 | U6.2 44.77,77.44 C37.2 | IC4.4 52.78,77.84 C42.2 v54.45,78.08 | R37.1 v57.47,78.56
  Top 0.406: IC1.4 68.58,23.47 67.94,24.1 67.94,25.06 C41.2 v69.85,25.37 | v59.69,9.02 C35.2 | R58.1 v48.26,24.1 | R4.1 v61.59,17.12 | R47.1 v90.17,19.02 | C33.2 v92.71,19.02 | U5.2 41.91,58.39 42.55,57.76 42.87,57.76 C36.2 | U5.1 42.88,57.74 C36.2 | D8.A v39.05,55.22 | D7.A v30,61.57 | C36.2 v43.18,56.01 | IC3.4 52.7,48.87 52.07,49.5 52.07,50.46 C39.2 v53.82,50.77 | R22.1 v55.72,43.15 | R35.1 v47.15,39.34 | C25.2 v55.72,39.34 | C38.1 v56.52,51.41 | D6.A v36.83,71.89 | v45.09,76.33 C37.2 | D5.A v36.83,82.84 | C31.2 v68.1,73.63 | R44.1 v68.1,71.73 | v46.99,52.68 45.09,52.68 R23.1 | C27.- v105.89,36.8 | T3.1 44.3,64.42 | 44.3,64.42 Q5.C | 44.3,64.42 44.14,64.59 v44.13,64.59 | T1.1 79.55,72.83 v80.01,72.36 Q4.C | C43.1 v72.39,16.48
  Top 0.61: v100.33,8.86 101.6,8.86 | 101.6,8.86 102.87,8.86 | v100.33,7.59 102.87,7.59 | v100.33,6.32 101.6,6.32 | v101.6,10.13 101.6,8.86
  Top 0.813: v102.87,10.13 102.87,8.86 102.87,7.59 C22.- 102.25,7.53 C23.2 108.91,6.96 116.84,6.96 117.73,7.85 U7.VOUT- | C30.2 116.84,26.64 | 116.84,26.64 C28.2 | 116.84,26.64 U3.2 107.82,26.64 C29.2
  pour Bottom (isolate 0.254): 5.08,95.86 5.08,4.26 114.3,4.26 114.3,95.86
GND1  (via drill 0.35)
  Top 0.254: U30.9 v123.7,81.89 v123.7,83.16 U30.10 | U30.15 v123.7,89.51 | v132.08,93.45 R16.1 | D1.C v148.08,86.84 | C68.2 v125.98,93.07
  Top 0.813: K2.C29 K2.C28 | K2.A29 K2.A28 K2.A27 K2.C27 K2.C28 | U31.2 145.92,35.15 | 145.92,35.15 146.69,35.92 146.69,41.76 146.18,42.27 C65.2 144.78,44.89 R10.1 144.77,46.39 147.07,48.68 147.07,80.24 144.87,82.43 C66.- 141.13,82.43 v141.1,82.4 | 145.92,35.15 145.86,35.09 146.56,34.39 C19.2 146.56,23.47 146.05,22.96 D2.A | U7.VIN- 135.25,6.58 C20.2 137.16,11.91 C21.- 141.1,15.85 C18.2 142.88,18.26 143.64,19.02 145.54,19.02 146.05,19.53 D2.A | K2.C28 148.21,20.8 147.79,21.22 D2.A
  pour Bottom (isolate 0.254): 123.19,95.22 123.19,81.38 124.08,80.49 137.92,80.49 141.73,76.68 147.69,76.68 147.51,82.59 147.96,83.03 156.59,83.03 157.23,83.67 157.23,90.4 156.21,91.41 146.05,91.41 140.97,96.49 124.46,96.49
  pour Top (isolate 0.254): 123.19,81.25 123.95,80.49 137.92,80.49 141.73,76.68 147.7,76.68 147.7,82.78 147.96,83.03 156.46,83.03 157.1,83.67 157.23,83.79 157.23,90.27 157.23,90.4 156.21,91.41 146.05,91.41 140.97,96.49 124.46,96.49 123.19,95.22
LED1
  Top 0.254: U1.88 95.89,73 75.09,93.8 R63.2
LED2
  Top 0.254: U1.89 95.39,72.23 76.2,91.41 R64.2
LED3
  Top 0.254: U1.90 94.89,71.46 77.47,88.87 R65.2
LED4
  Top 0.254: U1.91 94.39,70.69 78.74,86.33 R66.2
LED5
  Top 0.254: U1.1 86.58,56.27 81.28,61.57 67.94,61.57 64.14,65.38 64.14,66.65 63.5,67.28 R67.2
LED6
  Top 0.254: U1.2 86.45,55.77 81.28,60.93 67.31,60.93 63.5,64.74 R68.2
LED7
  Top 0.254: U1.3 86.31,55.27 81.28,60.3 65.41,60.3 63.5,62.2 R69.2
LED8
  Top 0.254: U1.4 86.18,54.77 81.28,59.66 R70.2
LED9
  Top 0.254: U1.31 92.39,35.84 90.81,34.26 79.38,34.26 76.83,36.8 R71.2
LED10
  Top 0.254: U1.32 92.89,35.71 90.81,33.63 76.2,33.63 R72.2
LED11
  Top 0.254: U1.33 93.39,35.57 90.81,32.99 78.11,32.99 76.83,31.72 R73.2
LED12
  Top 0.254: U1.34 93.89,35.44 90.81,32.36 80.01,32.36 76.83,29.18 R74.2
MODBUS_A
  Top 0.254: R13.1 126.24,85.32 126.62,84.93 R17.1 | S1.6 136.02,84.94 137.29,86.21 142.62,86.21 142.94,85.89 D1.E 145.6,85.89 147.19,84.3 K2.C3 K2.A3
  Top 0.406: R17.1 127.79,84.94 S1.6
MODBUS_B
  Top 0.254: R14.1 125.56,88.2 127.38,90.02 S1.4 134.75,90.02 137.29,87.48 S1.2 142.62,87.48 142.94,87.79 D1.B 145.6,87.79 147.19,89.38 K2.C1 K2.A1
N$1
  Top 0.406: IC2.3 R5.2 47.31,19.02 R6.1
N$2
  Top 0.254: U1.6 85.91,53.77 84.45,55.22 C15.1
N$3
  Top 0.406: Q1.3 R5.1
N$4
  Top 0.61: Q2.2 25.25,20.29 D4.1
  Top 1.016: Q2.2 Q2.4
N$5
  Top 0.406: Q1.2 53.83,19.66 R3.2 R4.2
N$6
  Top 0.406: R2.2 53.83,22.2 Q1.1
N$7
  Top 0.254: U30.13 122.81,86.97 123.19,87.35 R14.2
N$8
  Top 0.406: IC1.6 62.55,22.2 C4.1 61.91,22.2 R2.1
N$9
  Top 0.406: R3.1 61.91,19.66 C4.2 62.23,19.02 62.87,18.39 66.04,18.39 68.58,20.93 IC1.2
N$10
  Top 0.406: IC2.6 36.2,20.93 | 36.2,20.93 C6.2 | 36.2,20.93 R7.1
N$11
  Top 0.406: IC2.2 43.18,19.66 40.64,17.12 38.1,17.12 36.51,18.71 C6.1 R18.1
N$12
  Top 0.406: Q2.3 29.62,17.98 32.7,14.9 R18.2 38.26,14.9 R20.1
N$13
  Top 0.406: Q2.1 29.62,22.61 31.43,24.42 R7.2
N$14
  Top 0.813: L2.2 D2.C 144.23,16.82 142.49,15.09 142.49,12.17 141.22,10.9 C21.+ 139.7,8.74 140.08,8.36 140.08,6.7 C20.1 139.96,4.68 139.19,3.91 133.73,3.91 130.43,7.21 U7.VIN+ 130.43,10.26 136.14,15.98 136.14,17.5 136.91,18.26 C18.1 138.3,20.16 139.83,21.69 142.07,21.69 L4.1
N$15
  Top 0.406: IC1.3 R21.2 72.39,21.72 C43.2
N$16
  Top 0.813: U3.1 115.44,24.1 C30.1 116.84,20.93 114.3,18.39 L3.2
N$17
  Top 0.254: R27.2 C49.2 80.5,41.25 IC5.1
N$18
  Top 0.406: T2.2 44.93,50.14 R23.2
  Top 1.016: T2.2 T2.4
N$19
  Top 0.813: U7.VOUT+ 117.73,11.4 R1.1
N$20
  Top 0.254: LED5.C R31.1
N$21  (1 unrouted)
  Top 0.406: IC3.6 R19.1
N$22  (1 unrouted)
  Top 0.406: IC3.2 52.7,46.33 52.07,45.69 52.07,43.47 R22.2 R25.1
N$23
  Top 0.254: U30.12 122.81,85.7 123.19,85.32 R13.2
N$24
  Top 0.254: R24.2 56.52,44.58 C38.2
  Top 0.406: IC3.3 56.52,47.6 C38.2
N$25
  Top 0.406: Q3.C 32.55,47.6 40.01,47.6 40.23,47.83 T2.1 44.54,47.83 R19.2
N$26
  Top 0.406: T2.3 40.23,52.45 40.01,52.68 34.44,52.68 R26.1 33.34,51.57 Q3.B
N$27
  Top 0.406: Q3.E 31.43,51.57 R26.2 30.48,52.53 R28.1 30.63,57.12 R33.1
N$28
  Top 0.406: R29.1 30.63,59.66 R28.2 27.63,59.82 arc90 D14.3
N$29
  Top 0.406: U5.4 37.13,59.04 C24.1 36.69,59.48 D7.C 34.78,59.48 R29.2
N$30
  Top 0.406: U5.5 38.1,58.39 37.47,57.76 37.15,57.76 C24.2 36.69,57.3 D8.C 34.78,57.3 R33.2
N$32
  Top 0.406: R53.2 46.51,13.16 46.99,12.67 R50.1 | R53.2 46.51,16 47.31,16.8 R6.2 | R61.1 51.44,18.39 47.62,14.58 R53.2
N$33
  Top 0.254: C34.1 53.02,12.35 52.7,12.67
  Top 0.305: U4.4 53.64,12.05 C34.1
  Top 0.406: R50.2 52.7,12.67
N$34
  Top 0.406: S1.1 138.3,84.94 136.68,83.31 R15.1
N$35
  Top 0.254: S1.3 139.7,90.07 R16.2
N$36
  Top 0.254: S1.5 129.29,87.48 129.03,87.73 R17.2
N$37
  Top 0.254: R30.1 110.64,77.19 LED6.C
N$38
  Top 0.254: C32.2 55.72,74.12 R37.2 59.39,74.12 R38.1
  Top 0.305: IC4.3 54.93,74.9 C32.2
N$39
  Top 0.305: U6.4 39.03,78.09 C26.1
  Top 0.406: C26.1 36.97,78.39 D5.C 35.42,78.53 R41.2
N$40
  Top 0.305: U6.5 40.01,77.44 39.37,76.81 39.05,76.81 C26.2
  Top 0.406: C26.2 36.97,76.49 D6.C 35.42,76.35 R42.2
N$41
  Top 0.406: T3.3 43.96,62.52 Q5.B R76.2
N$42
  Top 0.254: C34.2 53.02,10.13
  Top 0.305: U4.5 54.61,11.4 53.98,10.77 53.66,10.77 C34.2
  Top 0.406: R51.2 53.02,10.13
N$43
  Top 0.406: R51.1 46.99,10.13 43.66,13.46 R53.1 R20.2
N$44
  Top 0.305: U4.6 55.66,10.03 57.63,8.07 73.97,8.07 75.25,9.35 R52.1
N$45
  Top 0.305: U4.3 59.39,12.05 C35.1 R54.1
N$46
  Top 0.406: R34.1 52.7,53.95 51.59,55.06 41.43,55.06 39.16,57.34 U5.6
N$47
  Top 0.406: U5.3 42.72,59.04 43.02,59.34 C36.1 R55.1
N$48
  Top 0.305: U6.6 41.06,73.85 45.09,69.82 R43.1
N$49
  Top 0.305: U6.3 42.76,78.93 43.49,79.66 C37.1
  Top 0.406: C37.1 45.09,80.93 R56.1
N$50
  Top 0.406: C39.1 50.8,50.46 50.8,46.96 50.16,46.33 IC3.7 46.84,46.33 R57.1
N$51
  Top 0.406: IC2.4 43.18,22.2 42.55,22.83 42.55,23.79 C40.2 R58.2
N$52
  Top 0.406: IC1.7 66.04,20.93 66.67,21.56 66.67,25.06 C41.1 R59.1
N$53
  Top 0.305: IC4.7 48.9,73.63 49.53,74.27 49.53,77.76 R60.1
  Top 0.406: C42.1 R60.1
N$54
  Top 0.406: T1.3 77.47,70.31 Q4.B R8.2
N$55
  Top 0.254: LED1.K 6.99,84.43 16.35,93.8 R63.1
N$56
  Top 0.254: R64.1 17.14,91.41 10.16,84.43 LED2.K
N$57
  Top 0.254: R65.1 17.78,88.87 13.34,84.43 LED7.K
N$58
  Top 0.254: R66.1 18.41,86.33 16.51,84.43 LED8.K
N$59
  Top 0.254: LED9.K 6.99,60.93 12.06,66.01 13.97,66.01 15.24,67.28 R67.1
N$60
  Top 0.254: R68.1 58.42,64.74 56.52,66.65 15.88,66.65 10.16,60.93 LED10.K
N$61
  Top 0.406: T1.2 D11.1
N$62
  Top 0.406: R75.1 76.67,78.08 D11.3
N$63
  Top 0.813: U31.1 143.76,31.85 C19.1 142.49,27.91 142.11,27.53 L4.2
N$64
  Top 0.254: R69.1 58.42,62.2 54.61,66.01 18.41,66.01 13.34,60.93 LED11.K
N$65
  Top 0.254: R70.1 58.42,59.66 52.7,65.38 20.95,65.38 16.51,60.93 LED12.K
N$66
  Top 0.254: LED13.K 6.99,37.44 10.16,40.61 40.49,40.61 45.57,35.53 65.89,35.53 67.16,36.8 R71.1
N$67
  Top 0.254: U30.1 112.33,90.87 C17.1 112.33,95.06 R49.1
N$68
  Top 0.254: LED14.K 10.16,37.44 12.7,39.98 39.85,39.98 45.57,34.26 R72.1
N$69
  Top 0.254: R73.1 46.84,31.72 39.22,39.34 15.24,39.34 13.34,37.44 LED15.K
N$70
  Top 0.254: R74.1 48.26,29.18 38.73,38.71 17.78,38.71 16.51,37.44 LED16.K
N$71
  Top 0.406: R45.1 71.75,73.95 C31.1 R44.2 71.75,71.41 R39.1
N$72
  Top 0.406: D12.1 T3.2
N$73
  Top 0.406: R78.1 D12.3
N$74
  Top 0.254: T4.3 95.39,16.48 Q6.B R79.2
N$75
  Top 0.254: D13.1 T4.2
N$76
  Top 0.254: R81.1 D13.3
N$77
  Top 0.305: R77.2 52.39,64.42 57.15,59.66 57.15,58.39 58.42,57.12 R82.1
  Top 0.406: Q5.E R76.1 R77.2
NRST  (via drill 0.35)
  Top 0.254: 104.24,64.74 K1.10 106.3,65.63 106.68,66.01 SW1.1 | v96.14,51.66 94.24,49.77 U1.14 | R12.1 102.68,64.87 v102.71,64.9 102.87,64.74 104.24,64.74 | C16.1 104.24,64.74
  Bottom 0.254: v102.71,64.9 102.71,58.24 v96.14,51.66
OSC
  Top 0.254: C13.1 81.86,50.88 | 81.86,50.88 81.92,50.88 81.92,50.56 R62.1 | OSC1.3 82.39,51.41 81.86,50.88
OSC+
  Top 0.254: C12.1 84.03,52.77 OSC1.1 84.45,52.68 86.37,50.77 U1.12
OSC-
  Top 0.254: U1.13 84.16,50.27 R62.2
OT_CONTROLLER
  Top 0.406: R36.2 R25.2 33.66,43.15 26.36,50.45 D14.1 | R78.2 29.21,63.47 26.04,60.3 26.04,57.61 D14.1 | D14.1 23.03,57.29 21.59,55.85 21.59,52.68 17.98,49.06 12.06,49.06 | 12.06,49.06 PL2.4 | PL2.3 11.85,48.85 12.06,49.06
OT_MONITOR_L
  Top 0.406: R42.1 31.27,76.17 R40.1 24.61,76.02 16.95,68.36 PL1.3
OT_MONITOR_R  (via drill 0.6)
  Top 0.406: R41.1 31.27,78.71 | 31.27,78.71 R40.2 31.11,80.62 34.29,83.79 v59.69,83.79 | v62.23,83.79 65.72,83.79 71.44,78.08 | 71.44,78.08 R45.2 | R75.2 71.44,78.08 | PL1.4 17.34,72.56 23.5,78.71 31.27,78.71
  Bottom 0.406: v59.69,83.79 v62.23,83.79
OT_THERMOSTAT  (via drill 0.6)
  Top 0.254: v81.92,9.5 78.74,6.32 34.29,6.32 24.13,16.48 D4.3 | v81.92,13.31 81.92,16.16 R81.2 82.23,18.07 83.82,19.66 R48.2
  Top 0.406: PL3.4 PL3.3 15.93,17.92 D4.3
  Bottom 0.254: v81.92,9.5 v81.92,13.31
POLARITY_CONTROLLER
  Top 0.254: U1.5 86.04,54.27 81.28,59.03 65.41,59.03 64.14,57.76
  Top 0.305: 64.14,57.76 63.5,57.12 R82.2
POLARITY_MONITOR
  Top 0.254: U1.92 93.89,63.57 88.9,68.55 81.13,68.55 Q4.E
  Top 0.406: Q4.E R8.1 R9.2
POLARITY_THERMOSTAT
  Top 0.254: R80.2 R79.1 Q6.E 95.89,18.87 95.89,23.47 97.89,25.47 U1.42
SWCLK
  Top 0.254: K1.4 103.5,60.93 101.89,59.31 U1.76
SWDIO
  Top 0.254: U1.72 105.47,54.77 105.79,54.45 109.22,54.45 110.17,55.4 110.17,58.08 108.58,59.66 K1.2
USART2_DE
  Top 0.254: U30.5 110.11,85.7 | 110.11,85.7 109.09,85.7 108.97,85.57 R32.2 108.04,84.9 107.82,84.68 107.82,82.14 109.22,80.75 109.22,76.43 108.33,75.54 106.05,75.54 97.39,66.88 U1.85 | U30.4 110.36,86.97 110.11,86.72 110.11,85.7
USART2_RXD
  Top 0.254: U30.3 110.49,88.24 108.94,86.69 R31.2 107.31,85.47 106.17,84.33 106.17,76.94 96.39,67.15 U1.87
USART2_TXD  (via drill 0.35)
  Top 0.254: U30.6 v110.49,84.43 | v106.96,83.79 106.96,81.61 107.8,80.77 R30.2 107.8,76.83 107.14,76.17 106.05,76.17 96.89,67.01 U1.86
  Bottom 0.254: v110.49,84.43 107.59,84.43 v106.96,83.79
VCC  (via drill 0.35)
  Top 0.254: 133.73,81.25 129.54,81.25 128.27,82.52 125.86,82.52 124.71,83.67 v124.71,88.75 | U30.16 121.44,91.32 122.24,92.12 C68.1 122.3,93.13 v122.3,94.46
  Top 0.406: C66.+ 142.15,77.03 139.28,79.9 135.44,79.9 R15.2 133.83,81.36 133.73,81.25
  Top 0.813: C66.+ 143.51,73.38 145.41,71.48 145.41,49.85 141.93,46.37 R10.2 141.98,44.85 C65.1 141.96,40.26 U31.3
  Bottom 0.254: v124.71,88.75 124.71,93.19 123.44,94.46 v122.3,94.46
VDDA
  Top 0.254: U1.22 86.69,45.77 86.53,45.61 C14.1 84.11,45.61 C11.1 84.07,45.69 76.83,45.69 76.05,46.48 L1.1
VREF  (via drill 0.6)
  Top 0.254: R38.2 64.14,72.52 64.14,71.09 70.48,64.9 v70.48,63.47 | U1.21 88.96,46.27 89.53,45.69 89.53,43.79 87,41.25 C48.1 C47.1 82.7,41.25 | 82.7,41.25 IC5.2 | 82.7,41.25 82.7,39.81 82.23,39.34 v78.11,39.34 | v70.48,54.58 v77.47,47.6
  Bottom 0.254: v70.48,63.47 v70.48,54.58 | v77.47,47.6 77.47,39.98 v78.11,39.34
VREF/2
  Top 0.305: IC4.6 45.09,74.9 43.81,74.9 42.76,75.96 U6.1
  Top 0.406: IC4.2 51.44,73.63 48.9,71.09 45.72,71.09 45.09,71.73 45.09,74.9

## Text on the board
tNames: TestX - OpenTherm board | Rev.A | Lukas Kurimsky (2020)